# EAGLE board cpu-68010 (EAGLE 9.2.1)
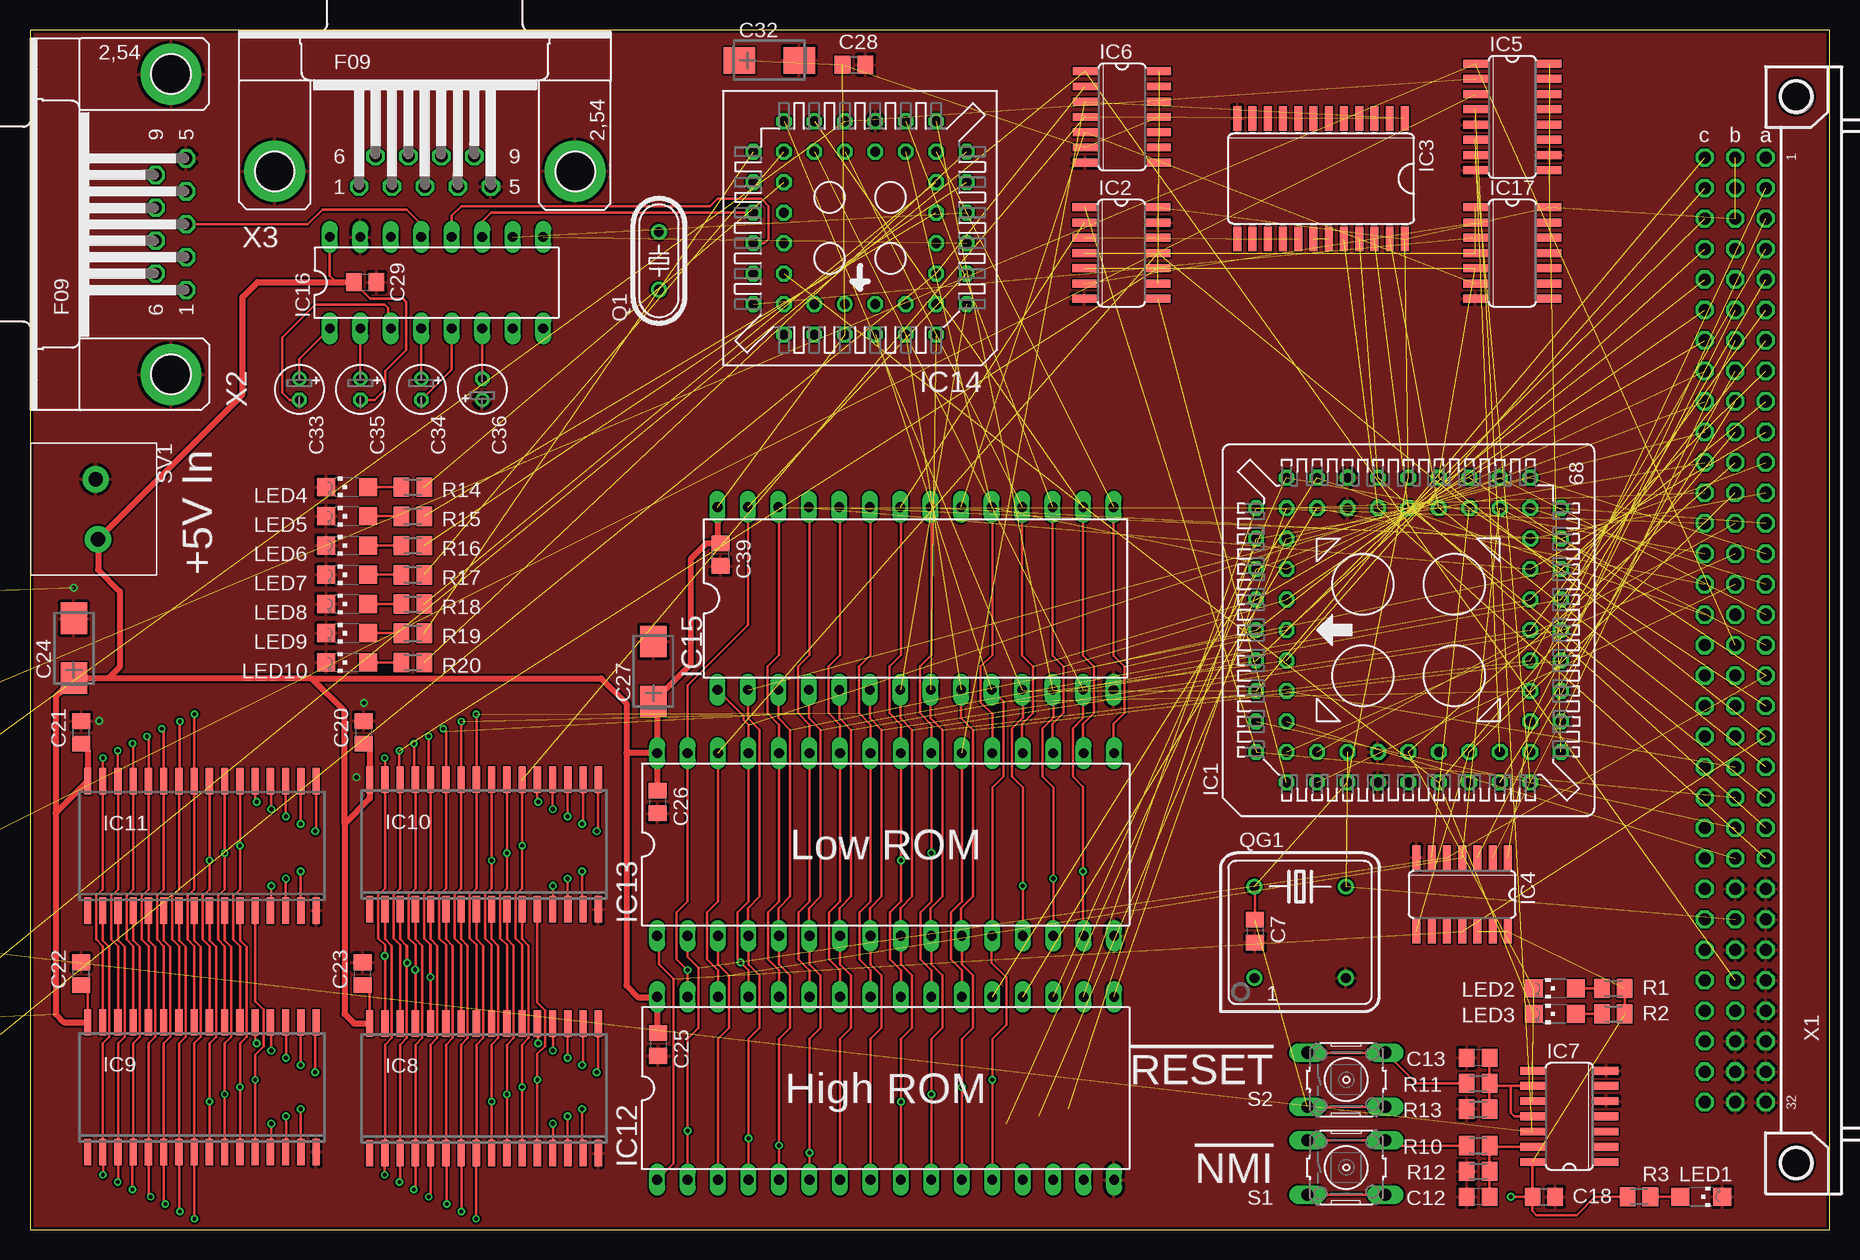
[diagram p0: board, top side]
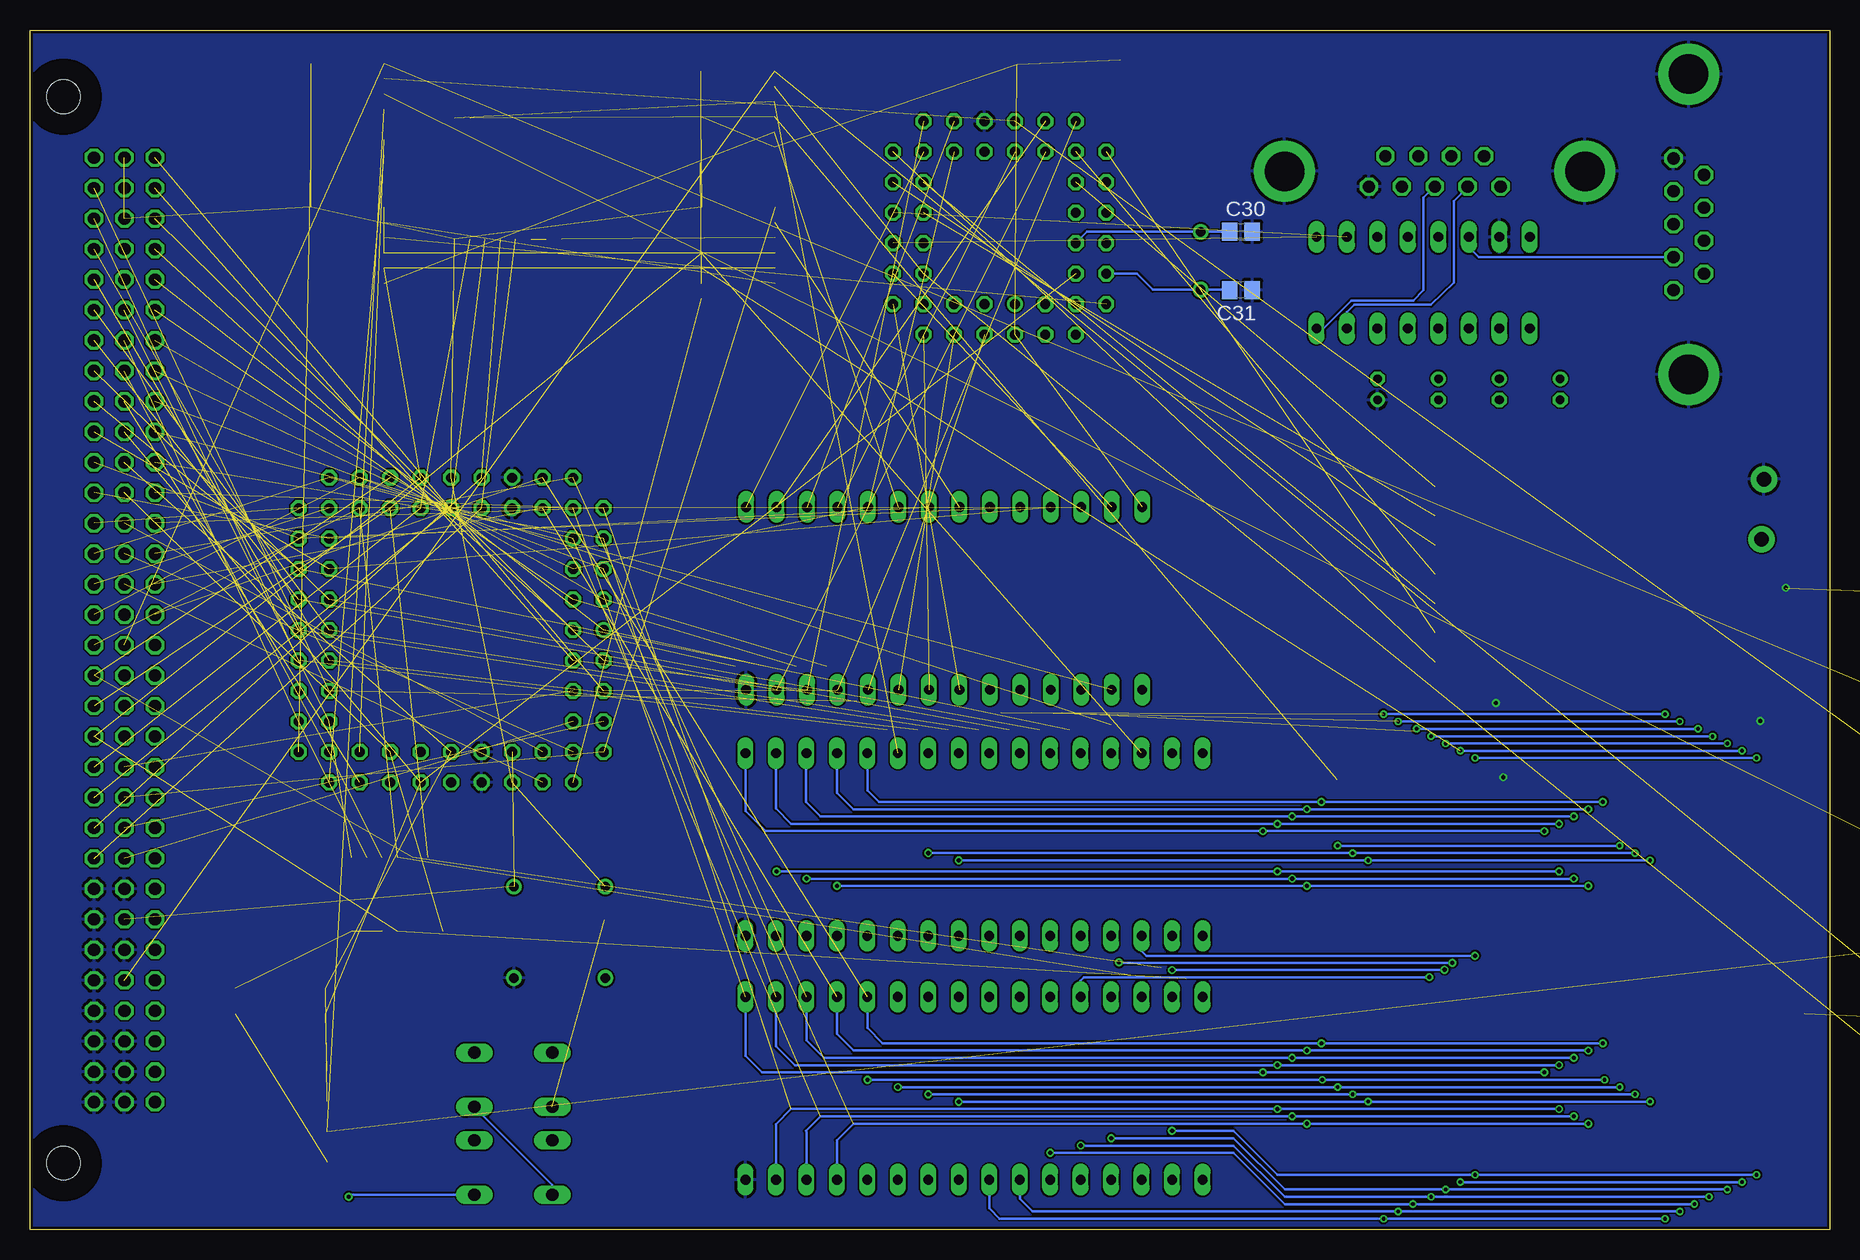
[diagram p1: board, bottom side, seen from below]

Size 150.01 x 100.03 mm. Coordinates in mm from the lower left corner, seen from the top.
Outline: 0,0.01 150,0.01 150,100.01 0,100.01 0,0.01
Copper layers (1*16): Top 0.035mm / dielectric 1.5mm / Bottom 0.035mm
Design rules "dirt_cheap_dirty_boards.v1.1": minimum track width 6mil, minimum drill 12mil, track to track 6mil, track to pad 6mil, pad to pad 6mil, via to via 6mil, smd to smd 0mil, copper to edge 10mil, drill to drill 10mil, minimum pad ring 10mil, minimum via ring 6mil, stop-mask expansion 2mil, vias tented up to drill 25mil, thermal gap 10mil

## Footprints (pad centres in the part's own frame; a part is rotated, then mirrored left to right if it is on the bottom)
C0805 = smd 1.3 x 1.5: 1 -0.95,0; 2 0.95,0
CT6032 = smd 2.6 x 2.2: + -2.5,0; - 2.5,0
E1,8-4 = drill 0.711 pad 1.168: + -0.889,0 | drill 0.711 pad 1.168 octagon: - 0.889,0
PLCC68SOCK = drill 0.813: 1 0,12.7 | drill 0.813 octagon: 2 0,10.16; 3 -2.54,12.7; 4 -2.54,10.16; 5 -5.08,12.7; 6 -5.08,10.16; 7 -7.62,12.7; 8 -7.62,10.16; 9 -10.16,12.7; 10 -12.7,10.16; 11 -10.16,10.16; 12 -12.7,7.62; 13 -10.16,7.62; 14 -12.7,5.08; 15 -10.16,5.08; 16 -12.7,2.54; 17 -10.16,2.54; 18 -12.7,0; 19 -10.16,0; 20 -12.7,-2.54; 21 -10.16,-2.54; 22 -12.7,-5.08; 23 -10.16,-5.08; 24 -12.7,-7.62; 25 -10.16,-7.62; 26 -12.7,-10.16; 27 -10.16,-12.7; 28 -10.16,-10.16; 29 -7.62,-12.7; 30 -7.62,-10.16; 31 -5.08,-12.7; 32 -5.08,-10.16; 33 -2.54,-12.7; 34 -2.54,-10.16; 35 0,-12.7; 36 0,-10.16; 37 2.54,-12.7; 38 2.54,-10.16; 39 5.08,-12.7; 40 5.08,-10.16; 41 7.62,-12.7; 42 7.62,-10.16; 43 10.16,-12.7; 44 12.7,-10.16; 45 10.16,-10.16; 46 12.7,-7.62; 47 10.16,-7.62; 48 12.7,-5.08; 49 10.16,-5.08; 50 12.7,-2.54; 51 10.16,-2.54; 52 12.7,0; 53 10.16,0; 54 12.7,2.54; 55 10.16,2.54; 56 12.7,5.08; 57 10.16,5.08; 58 12.7,7.62; 59 10.16,7.62; 60 12.7,10.16; 61 10.16,12.7; 62 10.16,10.16; 63 7.62,12.7; 64 7.62,10.16; 65 5.08,12.7; 66 5.08,10.16; 67 2.54,12.7; 68 2.54,10.16
SO14 = smd 0.66 x 2.032: 1 -3.81,-3.073; 2 -2.54,-3.073; 3 -1.27,-3.073; 4 0,-3.073; 5 1.27,-3.073; 6 2.54,-3.073; 7 3.81,-3.073; 8 3.81,3.073; 9 2.54,3.073; 10 1.27,3.073; 11 0,3.073; 12 -1.27,3.073; 13 -2.54,3.073; 14 -3.81,3.073
SO24W = smd 0.66 x 2.032: 1 -6.985,-5.029; 2 -5.715,-5.029; 3 -4.445,-5.029; 4 -3.175,-5.029; 5 -1.905,-5.029; 6 -0.635,-5.029; 7 0.635,-5.029; 8 1.905,-5.029; 9 3.175,-5.029; 10 4.445,-5.029; 11 5.715,-5.029; 12 6.985,-5.029; 13 6.985,5.029; 14 5.715,5.029; 15 4.445,5.029; 16 3.175,5.029; 17 1.905,5.029; 18 0.635,5.029; 19 -0.635,5.029; 20 -1.905,5.029; 21 -3.175,5.029; 22 -4.445,5.029; 23 -5.715,5.029; 24 -6.985,5.029
SO16 = smd 0.66 x 2.032: 1 -4.445,-3.073; 2 -3.175,-3.073; 3 -1.905,-3.073; 4 -0.635,-3.073; 5 0.635,-3.073; 6 1.905,-3.073; 7 3.175,-3.073; 8 4.445,-3.073; 9 4.445,3.073; 10 3.175,3.073; 11 1.905,3.073; 12 0.635,3.073; 13 -0.635,3.073; 14 -1.905,3.073; 15 -3.175,3.073; 16 -4.445,3.073
SO32X = smd 0.6 x 2.2: 1 -9.525,-5.4; 2 -8.255,-5.4; 3 -6.985,-5.4; 4 -5.715,-5.4; 5 -4.445,-5.4; 6 -3.175,-5.4; 7 -1.905,-5.4; 8 -0.635,-5.4; 9 0.635,-5.4; 10 1.905,-5.4; 11 3.175,-5.4; 12 4.445,-5.4; 13 5.715,-5.4; 14 6.985,-5.4; 15 8.255,-5.4; 16 9.525,-5.4; 17 9.525,5.4; 18 8.255,5.4; 19 6.985,5.4; 20 5.715,5.4; 21 4.445,5.4; 22 3.175,5.4; 23 1.905,5.4; 24 0.635,5.4; 25 -0.635,5.4; 26 -1.905,5.4; 27 -3.175,5.4; 28 -4.445,5.4; 29 -5.715,5.4; 30 -6.985,5.4; 31 -8.255,5.4; 32 -9.525,5.4
DIL32 = drill 0.813 long: 1 -19.05,-7.62; 2 -16.51,-7.62; 3 -13.97,-7.62; 4 -11.43,-7.62; 5 -8.89,-7.62; 6 -6.35,-7.62; 7 -3.81,-7.62; 8 -1.27,-7.62; 9 1.27,-7.62; 10 3.81,-7.62; 11 6.35,-7.62; 12 8.89,-7.62; 13 11.43,-7.62; 14 13.97,-7.62; 15 16.51,-7.62; 16 19.05,-7.62; 17 19.05,7.62; 18 16.51,7.62; 19 13.97,7.62; 20 11.43,7.62; 21 8.89,7.62; 22 6.35,7.62; 23 3.81,7.62; 24 1.27,7.62; 25 -1.27,7.62; 26 -3.81,7.62; 27 -6.35,7.62; 28 -8.89,7.62; 29 -11.43,7.62; 30 -13.97,7.62; 31 -16.51,7.62; 32 -19.05,7.62
PLCC-S44 = drill 0.813: 1 1.27,6.35 | drill 0.813 octagon: 2 -1.27,8.89; 3 -1.27,6.35; 4 -3.81,8.89; 5 -3.81,6.35; 6 -6.35,8.89; 7 -8.89,6.35; 8 -6.35,6.35; 9 -8.89,3.81; 10 -6.35,3.81; 11 -8.89,1.27; 12 -6.35,1.27; 13 -8.89,-1.27; 14 -6.35,-1.27; 15 -8.89,-3.81; 16 -6.35,-3.81; 17 -8.89,-6.35; 18 -6.35,-8.89; 19 -6.35,-6.35; 20 -3.81,-8.89; 21 -3.81,-6.35; 22 -1.27,-8.89; 23 -1.27,-6.35; 24 1.27,-8.89; 25 1.27,-6.35; 26 3.81,-8.89; 27 3.81,-6.35; 28 6.35,-8.89; 29 8.89,-6.35; 30 6.35,-6.35; 31 8.89,-3.81; 32 6.35,-3.81; 33 8.89,-1.27; 34 6.35,-1.27; 35 8.89,1.27; 36 6.35,1.27; 37 8.89,3.81; 38 6.35,3.81; 39 8.89,6.35; 40 6.35,8.89; 41 6.35,6.35; 42 3.81,8.89; 43 3.81,6.35; 44 1.27,8.89
DIL28-6 = drill 0.813 long: 1 -16.51,-7.62; 2 -13.97,-7.62; 3 -11.43,-7.62; 4 -8.89,-7.62; 5 -6.35,-7.62; 6 -3.81,-7.62; 7 -1.27,-7.62; 8 1.27,-7.62; 9 3.81,-7.62; 10 6.35,-7.62; 11 8.89,-7.62; 12 11.43,-7.62; 13 13.97,-7.62; 14 16.51,-7.62; 15 16.51,7.62; 16 13.97,7.62; 17 11.43,7.62; 18 8.89,7.62; 19 6.35,7.62; 20 3.81,7.62; 21 1.27,7.62; 22 -1.27,7.62; 23 -3.81,7.62; 24 -6.35,7.62; 25 -8.89,7.62; 26 -11.43,7.62; 27 -13.97,7.62; 28 -16.51,7.62
DIL16 = drill 0.813 long: 1 -8.89,-3.81; 2 -6.35,-3.81; 3 -3.81,-3.81; 4 -1.27,-3.81; 5 1.27,-3.81; 6 3.81,-3.81; 7 6.35,-3.81; 8 8.89,-3.81; 9 8.89,3.81; 10 6.35,3.81; 11 3.81,3.81; 12 1.27,3.81; 13 -1.27,3.81; 14 -3.81,3.81; 15 -6.35,3.81; 16 -8.89,3.81
CHIPLED_1206 = smd 1.5 x 1.5: A 0,-1.75; C 0,1.75
HC49/S = drill 0.813: 1 -2.413,0; 2 2.413,0
DIL08S = drill 0.813: 1 -3.81,-3.81; 4 3.81,-3.81; 5 3.81,3.81; 8 -3.81,3.81
M0805 = smd 1.3 x 1.6: 1 -0.95,0; 2 0.95,0
B3F-10XX = drill 1.016 long: 1 -3.251,2.261; 2 3.251,2.261; 3 -3.251,-2.261; 4 3.251,-2.261
1792863 = drill 1.2 pad 2.2: 1 0,-0.1; 2 5,0.1
FABC96R = drill 1.016 octagon: A1 -2.54,39.37; A2 -2.54,36.83; A3 -2.54,34.29; A4 -2.54,31.75; A5 -2.54,29.21; A6 -2.54,26.67; A7 -2.54,24.13; A8 -2.54,21.59; A9 -2.54,19.05; A10 -2.54,16.51; A11 -2.54,13.97; A12 -2.54,11.43; A13 -2.54,8.89; A14 -2.54,6.35; A15 -2.54,3.81; A16 -2.54,1.27; A17 -2.54,-1.27; A18 -2.54,-3.81; A19 -2.54,-6.35; A20 -2.54,-8.89; A21 -2.54,-11.43; A22 -2.54,-13.97; A23 -2.54,-16.51; A24 -2.54,-19.05; A25 -2.54,-21.59; A26 -2.54,-24.13; A27 -2.54,-26.67; A28 -2.54,-29.21; A29 -2.54,-31.75; A30 -2.54,-34.29; A31 -2.54,-36.83; A32 -2.54,-39.37; B1 -5.08,39.37; B2 -5.08,36.83; B3 -5.08,34.29; B4 -5.08,31.75; B5 -5.08,29.21; B6 -5.08,26.67; B7 -5.08,24.13; B8 -5.08,21.59; B9 -5.08,19.05; B10 -5.08,16.51; B11 -5.08,13.97; B12 -5.08,11.43; B13 -5.08,8.89; B14 -5.08,6.35; B15 -5.08,3.81; B16 -5.08,1.27; B17 -5.08,-1.27; B18 -5.08,-3.81; B19 -5.08,-6.35; B20 -5.08,-8.89; B21 -5.08,-11.43; B22 -5.08,-13.97; B23 -5.08,-16.51; B24 -5.08,-19.05; B25 -5.08,-21.59; B26 -5.08,-24.13; B27 -5.08,-26.67; B28 -5.08,-29.21; B29 -5.08,-31.75; B30 -5.08,-34.29; B31 -5.08,-36.83; B32 -5.08,-39.37; C1 -7.62,39.37; C2 -7.62,36.83; C3 -7.62,34.29; C4 -7.62,31.75; C5 -7.62,29.21; C6 -7.62,26.67; C7 -7.62,24.13; C8 -7.62,21.59; C9 -7.62,19.05; C10 -7.62,16.51; C11 -7.62,13.97; C12 -7.62,11.43; C13 -7.62,8.89; C14 -7.62,6.35; C15 -7.62,3.81; C16 -7.62,1.27; C17 -7.62,-1.27; C18 -7.62,-3.81; C19 -7.62,-6.35; C20 -7.62,-8.89; C21 -7.62,-11.43; C22 -7.62,-13.97; C23 -7.62,-16.51; C24 -7.62,-19.05; C25 -7.62,-21.59; C26 -7.62,-24.13; C27 -7.62,-26.67; C28 -7.62,-29.21; C29 -7.62,-31.75; C30 -7.62,-34.29; C31 -7.62,-36.83; C32 -7.62,-39.37 | hole 2.794: 0,-44.456; 0,44.456
F09HP = drill 1.016 octagon: 1 -5.486,-1.27; 2 -2.743,-1.27; 3 0,-1.27; 4 2.743,-1.27; 5 5.486,-1.27; 6 -4.115,1.27; 7 -1.372,1.27; 8 1.372,1.27; 9 4.115,1.27 | drill 3.302 pad 5.08: G1 -12.522,0; G2 12.522,0

## Placement (x,y rotation side)
C1  100nF  [C0805]  -5.63,68.79 0 top  (outside the outline)
C2  100nF  [C0805]  -13.63,84.33 0 top  (outside the outline)
C3  100nF  [C0805]  -19.62,50.33 0 top  (outside the outline)
C4  47µF  [CT6032]  -6.82,61.82 0 top  (outside the outline)
C5  100nF  [C0805]  -11.31,90.95 0 top  (outside the outline)
C6  100nF  [C0805]  -15.76,70.41 0 top  (outside the outline)
C7  100nF  [C0805]  102.11,24.9 270 top
C8  47µF  [CT6032]  -9.32,97.01 0 top  (outside the outline)
C9  100nF  [C0805]  -10.16,77.48 0 top  (outside the outline)
C10  100nF  [C0805]  -19.42,43.12 0 top  (outside the outline)
C11  47µF  [CT6032]  -17.77,61 0 top  (outside the outline)
C12  100nF  [C0805]  120.7,2.76 180 top
C13  100nF  [C0805]  120.7,14.34 180 top
C14  100nF  [C0805]  -18.39,37.39 0 top  (outside the outline)
C15  100nF  [C0805]  -15.56,46.95 0 top  (outside the outline)
C16  100nF  [C0805]  -17.05,14.04 0 top  (outside the outline)
C17  100nF  [C0805]  -18.02,21 0 top  (outside the outline)
C18  100nF  [C0805]  126.19,2.76 0 top
C19  47µF  [CT6032]  -18.64,29.63 0 top  (outside the outline)
C20  100nF  [C0805]  27.83,41.47 90 top
C21  100nF  [C0805]  4.27,41.47 90 top
C22  100nF  [C0805]  4.27,21.35 90 top
C23  100nF  [C0805]  27.74,21.35 90 top
C24  47µF  [CT6032]  3.66,48.48 90 top
C25  100nF  [C0805]  52.37,15.46 270 top
C26  100nF  [C0805]  52.32,35.67 270 top
C27  47µF  [CT6032]  51.97,46.55 90 top
C28  100nF  [C0805]  68.68,97.14 0 top
C29  100nF  [C0805]  27.94,79.01 0 top
C30  30pF  [C0805]  49.07,83.22 0 bottom
C31  30pF  [C0805]  49.07,78.35 180 bottom
C32  47µF  [CT6032]  61.62,97.5 0 top
C33  10µF  [E1,8-4]  22.45,70.07 270 top
C34  10µF  [E1,8-4]  32.61,70.07 270 top
C35  10µF  [E1,8-4]  27.53,70.07 270 top
C36  10µF  [E1,8-4]  37.69,70.07 90 top
C37  100nF  [C0805]  -12.7,66.05 0 top  (outside the outline)
C38  100nF  [C0805]  -19.05,54.62 0 top  (outside the outline)
C39  100nF  [C0805]  57.56,56.3 270 top
C40  47µF  [CT6032]  -6.84,53.19 0 top  (outside the outline)
IC1  [PLCC68SOCK]  114.91,50 90 top
IC2  74HC04D  [SO14]  90.97,81.43 270 top
IC3  74HCT154DW  [SO24W]  107.62,87.63 180 top
IC4  74HC30D  [SO14]  119.38,27.95 180 top
IC5  74HC148D  [SO16]  123.56,92.78 270 top
IC6  74HC30D  [SO14]  91.03,92.78 270 top
IC7  74HC14D  [SO14]  128.32,9.46 90 top
IC8  [SO32X]  37.85,11.8 0 top
IC9  [SO32X]  14.33,11.9 0 top
IC10  [SO32X]  37.85,32.12 0 top
IC11  [SO32X]  14.33,32.02 0 top
IC12  [DIL32]  71.32,11.8 0 top
IC13  [DIL32]  71.32,32.12 0 top
IC14  [PLCC-S44]  69.19,83.53 180 top
IC15  [DIL28-6]  73.81,52.64 0 top
IC16  MAX232  [DIL16]  33.88,78.96 0 top
IC17  74HC00D  [SO14]  123.56,81.43 270 top
LED1  GRN  [CHIPLED_1206]  139.29,2.76 270 top
LED2  RED  [CHIPLED_1206]  127.1,20.13 90 top
LED3  RED  [CHIPLED_1206]  127.1,18 90 top
LED4  YEL  [CHIPLED_1206]  26.43,61.93 90 top
LED5  YEL  [CHIPLED_1206]  26.43,59.49 90 top
LED6  YEL  [CHIPLED_1206]  26.43,57.05 90 top
LED7  YEL  [CHIPLED_1206]  26.43,54.61 90 top
LED8  YEL  [CHIPLED_1206]  26.43,52.17 90 top
LED9  YEL  [CHIPLED_1206]  26.43,49.74 90 top
LED10  YEL  [CHIPLED_1206]  26.43,47.3 90 top
Q1  3.6864MHz  [HC49/S]  52.43,80.78 90 top
QG1  [DIL08S]  105.87,24.8 0 top
R1  2k  [M0805]  131.98,20.13 180 top
R2  2k  [M0805]  131.98,18 180 top
R3  2k  [M0805]  134.11,2.76 0 top
R4  10k  [M0805]  -10.01,42.98 0 top  (outside the outline)
R5  10k  [M0805]  -10.01,36.58 0 top  (outside the outline)
R6  10k  [M0805]  -10.01,30.18 0 top  (outside the outline)
R7  10k  [M0805]  -10.01,23.78 0 top  (outside the outline)
R8  10k  [M0805]  -10.01,17.38 0 top  (outside the outline)
R9  10k  [M0805]  -10.01,10.98 0 top  (outside the outline)
R10  10k  [M0805]  120.7,7.02 180 top
R11  10k  [M0805]  120.7,12.2 180 top
R12  10k  [M0805]  120.7,4.89 180 top
R13  10k  [M0805]  120.7,10.07 180 top
R14  2k  [M0805]  31.91,61.93 180 top
R15  2k  [M0805]  31.91,59.49 180 top
R16  2k  [M0805]  31.91,57.05 180 top
R17  2k  [M0805]  31.91,54.61 180 top
R18  2k  [M0805]  31.91,52.17 180 top
R19  2k  [M0805]  31.91,49.74 180 top
R20  2k  [M0805]  31.91,47.3 180 top
S1  [B3F-10XX]  109.73,5.19 0 top
S2  [B3F-10XX]  109.73,12.51 0 top
SV1  1792863  [1792863]  5.58,62.58 270 top
X1  FABC96R  [FABC96R]  147.22,50.01 0 top
X2  [F09HP]  11.75,83.83 90 top
X3  [F09HP]  32.92,88.24 0 top

## Library data of the parts
C1-C3 C5-C7 C9 C10 C12-C18 C20-C23 C25 C26 C28-C31 C37-C39 = rcl; MOUSER: 710-885012207072; SPICEPREFIX: C
C4 C8 C11 C19 C24 C27 C32 C40 = rcl; MOUSER: 581-TAJD476M016RNJV; SPICEPREFIX: C
C33-C36 = rcl; SPICEPREFIX: C
IC1 = 68komputer; OC_FARNELL: unknown; OC_NEWARK: unknown
IC2-IC7 IC17 = 74xx-eu
IC8-IC11 IC14 = 68komputer
IC12 IC13 = 68komputer; MOUSER: 804-39SF020A7CPHE
IC15 = 68komputer; MOUSER: 700-DS1244Y-70
IC16 = maxim; MF: MAXIM; MPN: MAX232ACPE+; OC_FARNELL: 9723773; OC_NEWARK: 68K4544
LED1 = led; MOUSER: 604-APTR3216SGC
LED2 LED3 = led; MOUSER: 710-156120RS75300
LED4-LED10 = led; MOUSER: 710-156120YS75300
Q1 = crystal; OC_FARNELL: 1667008; OC_NEWARK: unknown
QG1 = crystal; OC_FARNELL: unknown; OC_NEWARK: unknown
R1-R20 = rcl; MOUSER: 652-CR0805-FX6800GLF; SPICEPREFIX: R
S1 S2 = switch-omron; MPN: B3F-1000; OC_FARNELL: 176432; OC_NEWARK: 36M3542
SV1 = 68komputer; MOUSER: 651-1792863
X1 = con-vg
X2 X3 = con-subd; OC_FARNELL: unknown; OC_NEWARK: unknown

## Nets
68681_XTAL1: C30.1 IC14.36 Q1.2
68681_XTAL2: C31.2 IC14.37 Q1.1
!68681_CS: IC14.39 IC17.3
!68681_DTACK: IC6.2 IC14.10 R9.2
!68681_IRQ: IC5.2 IC14.24 R5.2
!68681_IRQACK: IC14.41
!A18: IC2.10 IC8.30 IC9.30 IC10.30 IC11.30
!A19: IC2.6 IC17.2
!AS: IC1.6 X1.B21
!BERR: IC1.24 X1.B9
!BG: IC1.11 X1.B14
!BGACK: IC1.12 X1.B15
!BR: IC1.13 X1.B13
!DTACK: IC1.10 IC2.8
!EXT_DTACK: IC6.1 R8.2 X1.B28
!EXT_IRQ: IC5.1 R4.2 X1.B17
!HALT: IC1.19 IC7.10 LED2.C X1.B11
!IPL0: IC1.27 IC5.9
!IPL1: IC1.26 IC5.7
!IPL2: IC1.25 IC5.6
!LDS: IC1.8 X1.B24
!NMI: IC5.4 IC7.12 R7.2
!OE: IC2.2 IC8.24 IC9.24 IC10.24 IC11.24 IC12.24 IC13.24 IC15.22
!REGION0: IC3.1 IC6.3 IC12.22 IC13.22
!REGION1: IC3.2 IC6.4 IC8.22 IC9.22 IC10.22 IC11.22
!REGION2: IC3.3
!REGION3: IC3.4
!REGION4: IC3.5
!REGION5: IC3.6
!REGION6: IC3.7
!REGION7: IC3.8
!REGION8: IC3.9
!REGION9: IC3.10
!REGION10: IC3.11
!REGION11: IC3.13
!REGION12: IC3.14
!REGION13: IC3.15
!REGION14: IC3.16
!REGION15: IC2.3 IC3.17
!RESET: IC1.20 IC7.8 IC14.38 LED3.C X1.B10
!RTC_CS: IC6.5 IC15.20 IC17.6
!TIMER_IRQ: IC5.3 R6.2
!UDS: IC1.7 X1.B23
!VMA: IC1.21
!VPA: IC1.23 IC4.8 X1.B12
+5V: C1.1 C2.1 C3.1 C4.+ C5.1 C6.1 C7.1 C8.+ C9.1 C10.1 C11.+ C14.1 C15.1 C16.1 C17.1 C18.1 C19.+ C20.1 C21.1 C22.1 C23.1 C24.+ C25.1 C26.1 C27.+ C28.1 C29.1 C32.+ C35.- C37.1 C38.1 C39.1 C40.+ IC1.14 IC1.52 IC2.14 IC3.24 IC4.12 IC4.14 IC5.11 IC5.12 IC5.13 IC5.16 IC6.6 IC6.11 IC6.12 IC6.14 IC7.14 IC8.32 IC9.32 IC10.32 IC11.32 IC12.32 IC13.32 IC14.44 IC15.28 IC16.16 IC17.14 QG1.8 R1.1 R2.1 R3.1 R4.1 R8.1 R9.1 S1.3 S1.4 S2.3 S2.4 SV1.2 X1.B1 X1.B2 X1.B3
/AS: IC3.18 IC3.19
A1: IC1.32 IC8.12 IC9.12 IC10.12 IC11.12 IC12.12 IC13.12 IC14.2 IC15.10 X1.A2
A2: IC1.33 IC8.11 IC9.11 IC10.11 IC11.11 IC12.11 IC13.11 IC14.4 IC15.9 X1.A3
A3: IC1.34 IC8.10 IC9.10 IC10.10 IC11.10 IC12.10 IC13.10 IC14.6 IC15.8 X1.A4
A4: IC1.35 IC8.9 IC9.9 IC10.9 IC11.9 IC12.9 IC13.9 IC14.7 IC15.7 X1.A5
A5: IC1.36 IC8.8 IC9.8 IC10.8 IC11.8 IC12.8 IC13.8 IC15.6 X1.A6
A6: IC1.37 IC8.7 IC9.7 IC10.7 IC11.7 IC12.7 IC13.7 IC15.5 X1.A7
A7: IC1.38 IC8.6 IC9.6 IC10.6 IC11.6 IC12.6 IC13.6 IC15.4 X1.A8
A8: IC1.39 IC8.5 IC9.5 IC10.5 IC11.5 IC12.5 IC13.5 IC15.3 X1.A9
A9: IC1.40 IC8.27 IC9.27 IC10.27 IC11.27 IC12.27 IC13.27 IC15.25 X1.A10
A10: IC1.41 IC8.26 IC9.26 IC10.26 IC11.26 IC12.26 IC13.26 IC15.24 X1.A11
A11: IC1.42 IC8.23 IC9.23 IC10.23 IC11.23 IC12.23 IC13.23 IC15.21 X1.A12
A12: IC1.43 IC8.25 IC9.25 IC10.25 IC11.25 IC12.25 IC13.25 IC15.23 X1.A13
A13: IC1.44 IC8.4 IC9.4 IC10.4 IC11.4 IC12.4 IC13.4 IC15.2 X1.A14
A14: IC1.45 IC8.28 IC9.28 IC10.28 IC11.28 IC12.28 IC13.28 IC15.26 X1.A15
A15: IC1.46 IC8.3 IC9.3 IC10.3 IC11.3 IC12.29 IC13.29 IC15.1 X1.A16
A16: IC1.47 IC4.4 IC8.31 IC9.31 IC10.31 IC11.31 IC12.3 IC13.3 X1.A17
A17: IC1.48 IC4.5 IC8.2 IC9.2 IC10.2 IC11.2 IC12.2 IC13.2 X1.A18
A18: IC1.49 IC2.11 IC4.6 IC12.30 IC13.30 X1.A19
A19: IC1.50 IC2.5 IC4.11 IC12.1 IC13.1 IC17.5 X1.A20
A20: IC1.51 IC3.23 X1.A21
A21: IC1.53 IC3.22 X1.A22
A22: IC1.54 IC3.21 X1.A23
A23: IC1.55 IC3.20 X1.A24
CLK: IC1.15 QG1.5 X1.B26
D0: IC1.5 IC10.13 IC11.13 IC13.13 IC14.28 IC15.11 X1.C1
D1: IC1.4 IC10.14 IC11.14 IC13.14 IC14.18 IC15.12 X1.C2
D2: IC1.3 IC10.15 IC11.15 IC13.15 IC14.27 IC15.13 X1.C3
D3: IC1.2 IC10.17 IC11.17 IC13.17 IC14.19 IC15.15 X1.C4
D4: IC1.1 IC10.18 IC11.18 IC13.18 IC14.26 IC15.16 X1.C5
D5: IC1.68 IC10.19 IC11.19 IC13.19 IC14.20 IC15.17 X1.C6
D6: IC1.67 IC10.20 IC11.20 IC13.20 IC14.25 IC15.18 X1.C7
D7: IC1.66 IC10.21 IC11.21 IC13.21 IC14.21 IC15.19 X1.C8
D8: IC1.65 IC8.13 IC9.13 IC12.13 X1.C9
D9: IC1.64 IC8.14 IC9.14 IC12.14 X1.C10
D10: IC1.63 IC8.15 IC9.15 IC12.15 X1.C11
D11: IC1.62 IC8.17 IC9.17 IC12.17 X1.C12
D12: IC1.61 IC8.18 IC9.18 IC12.18 X1.C13
D13: IC1.60 IC8.19 IC9.19 IC12.19 X1.C14
D14: IC1.59 IC8.20 IC9.20 IC12.20 X1.C15
D15: IC1.58 IC8.21 IC9.21 IC12.21 X1.C16
DTACK: IC2.9 IC6.8
E: IC1.22
FC0: IC1.30 IC4.1 X1.B6
FC1: IC1.29 IC4.2 X1.B7
FC2: IC1.28 IC4.3 X1.B8
GND: C1.2 C2.2 C3.2 C4.- C5.2 C6.2 C7.2 C8.- C9.2 C10.2 C11.- C12.2 C13.2 C14.2 C15.2 C16.2 C17.2 C18.2 C19.- C20.2 C21.2 C22.2 C23.2 C24.- C25.2 C26.2 C27.- C28.2 C29.2 C30.2 C31.1 C32.- C36.+ C37.2 C38.2 C39.2 C40.- IC1.16 IC1.17 IC1.56 IC1.57 IC2.7 IC2.13 IC3.12 IC4.7 IC5.5 IC5.8 IC5.10 IC6.7 IC7.5 IC7.7 IC8.16 IC9.16 IC10.16 IC11.16 IC12.16 IC13.16 IC14.22 IC15.14 IC16.15 IC17.7 LED1.C LED4.C LED5.C LED6.C LED7.C LED8.C LED9.C LED10.C QG1.4 R12.2 R13.2 SV1.1 X1.A25 X1.A26 X1.A27 X1.A28 X1.A29 X1.A30 X1.A31 X1.A32 X1.B25 X1.B27 X1.B30 X1.B31 X1.B32 X2.5 X2.G1 X2.G2 X3.5 X3.G1 X3.G2
GPIO_IN0: IC14.8
GPIO_IN1: IC14.5
GPIO_IN2: IC14.40
GPIO_IN3: IC14.3
GPIO_IN4: IC14.43
GPIO_IN5: IC14.42
GPIO_OUT0: IC14.32 R14.1
GPIO_OUT1: IC14.14 R15.1
GPIO_OUT2: IC14.15 R16.1
GPIO_OUT3: IC14.30 R17.1
GPIO_OUT4: IC14.16 R18.1
GPIO_OUT5: IC14.29 R19.1
GPIO_OUT6: IC14.17 R20.1
N$1: C35.+ IC16.2
N$2: C36.- IC16.6
N$3: C33.+ IC16.1
N$4: C34.+ IC16.4
N$5: C33.- IC16.3
N$6: C34.- IC16.5
N$7: LED9.A R19.2
N$8: LED8.A R18.2
N$9: R11.2 S2.1 S2.2
N$10: LED7.A R17.2
N$11: LED6.A R16.2
N$12: LED3.A R2.2
N$13: LED5.A R15.2
N$14: LED4.A R14.2
N$15: LED2.A R1.2
N$17: LED10.A R20.2
N$18: R10.2 S1.1 S1.2
N$19: LED1.A R3.2
NMI_SW: C12.1 IC7.13 R10.1 R12.1
R!W!: IC1.9 IC2.1 X1.B22
R/!W!: IC8.29 IC9.29 IC10.29 IC11.29 IC12.31 IC13.31 IC14.9 IC15.27
REGION15: IC2.4 IC17.1 IC17.4
RESET_SW: C13.1 IC7.9 IC7.11 R11.1 R13.1
RS232_0_RX: IC16.14 X2.2
RS232_0_TX: IC16.13 X2.3
RS232_1_RX: IC16.7 X3.2
RS232_1_TX: IC16.8 X3.3
TIMER_CLK: IC14.31
UART0_RX: IC14.35 IC16.12
UART0_TX: IC14.33 IC16.11
UART1_RX: IC14.11 IC16.9
UART1_TX: IC14.13 IC16.10

## Tracks (layer width: path | path; a pad name or v marks a point on that pad's centre or on a via)
68681_XTAL1
  Bottom 0.203: C30.1 52.4,83.22 Q1.2 61.9,83.2 IC14.36
68681_XTAL2
  Bottom 0.203: C31.2 50.05,78.37 Q1.1 56.41,78.37 57.76,79.72 IC14.37
!68681_CS  (1 unrouted)
!68681_DTACK  (2 unrouted)
!68681_IRQ  (2 unrouted)
!A18  (via drill 0.3)  (1 unrouted)
  Top 0.203: IC8.30 30.86,23.74 30.31,24.29 30.31,27.92 30.86,28.48 IC10.30 30.79,37.59 v30.79,39.94 | IC9.30 7.34,23.64 6.79,24.19 6.79,27.82 7.34,28.38 IC11.30 7.32,37.44 v7.32,39.94
  Bottom 0.203: v7.32,39.94 v30.79,39.94
!A19  (1 unrouted)
!AS  (1 unrouted)
!BERR  (1 unrouted)
!BG  (1 unrouted)
!BGACK  (1 unrouted)
!BR  (1 unrouted)
!DTACK  (1 unrouted)
!EXT_DTACK  (2 unrouted)
!EXT_IRQ  (2 unrouted)
!HALT  (3 unrouted)
!IPL0  (1 unrouted)
!IPL1  (1 unrouted)
!IPL2  (1 unrouted)
!LDS  (1 unrouted)
!NMI  (2 unrouted)
!OE  (via drill 0.3, 0.35)  (1 unrouted)
  Top 0.203: IC8.24 38.48,23.74 37.93,24.29 37.93,27.92 38.48,28.48 v38.48,30.8 IC10.24 | IC9.24 14.96,23.64 14.41,24.19 14.41,27.82 14.96,28.38 v14.96,30.8 IC11.24 | IC12.24 72.59,21.63 71.68,22.54 71.68,26.45 72.59,27.37 v72.59,30.8 IC13.24 72.59,42.1 71.63,43.07 71.63,46.97 72.59,47.94 72.59,60.21 IC15.22
  Bottom 0.203: v14.96,30.8 v38.48,30.8 v72.59,30.8
!REGION0  (2 unrouted)
  Top 0.203: IC12.22 77.67,21.63 76.76,22.54 76.76,26.45 77.67,27.37 IC13.22
!REGION1  (via drill 0.3)  (2 unrouted)
  Top 0.203: IC8.22 41.02,23.74 40.47,24.29 40.47,27.92 41.02,28.48 v41.02,32.02 IC10.22 | IC9.22 17.5,23.64 16.95,24.19 16.95,27.82 17.5,28.38 v17.5,32.02 IC11.22
  Bottom 0.203: v17.5,32.02 v41.02,32.02
!REGION15  (1 unrouted)
!RESET  (4 unrouted)
!RTC_CS  (2 unrouted)
!TIMER_IRQ  (1 unrouted)
!UDS  (1 unrouted)
!VPA  (2 unrouted)
+5V  (via drill 0.35)  (45 unrouted)
  Top 0.203: IC16.16 24.99,79.57 25.55,79.01 C29.1 28.36,77.64 31.1,77.64 31.34,77.35 31.34,73.36 29.62,71.6 29.62,70.06 28.73,69.18 C35.- | S1.4 S1.3 | S2.3 S2.4 | IC7.14 125.25,2.77 C18.1 | v123.44,2.76 C18.1 | R1.1 R2.1 | C23.1 28.32,19.81 IC8.32 | C22.1 4.8,19.87 IC9.32 | C21.1 4.8,39.98 | C20.1 28.32,40.02 | 52.27,36.67 C26.1 | 52.27,16.51 C25.1 | 57.3,57.5 C39.1 | QG1.8 102.11,28.56 C7.1 | C27.+ 52.27,43.74 | R3.1 130.45,2.76 128.93,1.23 125.58,1.23 125.24,1.57 C18.1
  Top 0.508: 4.8,39.98 IC11.32 2.13,34.75 | 28.32,40.02 IC10.32 28.32,35.95 26.21,33.85 | IC13.32 52.27,36.67 | 52.27,16.51 IC12.32 52.23,19.38 50.69,19.38 49.71,20.36 49.71,39.73 | 26.21,33.85 26.21,18 27.01,17.2 IC8.32 | IC9.32 2.83,17.3 2.13,18 2.13,34.75 | 2.13,34.75 2.13,44.45 C24.+ 6.53,45.96 | IC15.28 57.3,57.5 | 52.27,43.74 IC13.32 | 6.53,45.96 7.49,46.92 7.49,53.23 5.68,55.05 SV1.2 17.73,69.63 17.73,77.76 18.97,79.01 C29.1 | 26.21,33.85 26.21,43.24 23.49,45.96 | 23.49,45.96 6.53,45.96 | 23.49,45.96 47.62,45.96 49.71,43.88 49.71,39.73 | IC13.32 49.72,39.74 49.71,39.73 | C27.+ 55.1,47.18 55.1,55.96 56.39,57.25 C39.1
  Bottom 0.203: S2.4 106.48,3.75 S1.3 | S1.4 123.27,2.93 v123.44,2.76
/AS  (1 unrouted)
A1  (via drill 0.3, 0.35)  (3 unrouted)
  Top 0.203: IC10.12 42.29,18.96 42.95,18.3 42.95,15.32 42.29,14.66 v42.29,12.51 IC8.12 | IC9.12 v18.77,12.51 18.77,14.61 19.48,15.32 19.48,18.35 18.77,19.06 IC11.12 | IC15.10 81.13,44.06 81.13,37.78 80.21,36.87 IC13.12 80.16,24.45 80.16,22.26 81.38,21.04 81.38,17.08 80.21,15.91 v80.21,12.51 IC12.12
  Bottom 0.203: v18.77,12.51 v42.29,12.51 v80.21,12.51
A2  (via drill 0.3, 0.35)  (3 unrouted)
  Top 0.203: IC10.11 41.02,24.24 41.58,23.69 41.58,15.99 41.02,15.44 v41.02,11.9 IC8.11 | IC11.11 17.5,24.14 18.05,23.59 18.05,16.09 17.5,15.54 v17.5,11.9 IC9.11 | 77.67,24.4 77.67,22.13 78.59,21.22 78.59,16.85 77.67,15.94 v77.67,11.9 IC12.11 | 77.67,24.4 IC13.11 | 77.67,24.4 77.62,24.45 77.62,26.81 78.59,27.78 78.59,41.69 77.62,42.66 IC15.9
  Bottom 0.203: v17.5,11.9 v41.02,11.9 v77.67,11.9
A3  (via drill 0.3, 0.35)  (3 unrouted)
  Top 0.203: IC10.10 39.75,24.24 40.3,23.69 40.3,15.99 39.75,15.44 v39.75,11.29 IC8.10 | IC11.10 16.23,24.14 16.79,23.59 16.79,16.09 16.23,15.54 v16.23,11.29 IC9.10 | 75.13,24.4 75.13,22.13 76.05,21.22 76.05,16.85 75.13,15.94 v75.13,11.29 IC12.10 | 75.13,24.4 IC13.10 | 75.13,24.4 75.08,24.45 75.08,26.81 76.05,27.78 76.05,41.69 75.08,42.66 IC15.8
  Bottom 0.203: v16.23,11.29 v39.75,11.29 v75.13,11.29
A4  (via drill 0.3, 0.35)  (3 unrouted)
  Top 0.203: IC10.9 38.48,24.24 39.03,23.69 39.03,15.99 38.48,15.44 v38.48,10.68 IC8.9 | IC11.9 14.96,24.14 15.52,23.59 15.52,16.09 14.96,15.54 v14.96,10.68 IC9.9 | IC12.9 v72.59,10.68 72.59,15.94 73.51,16.85 73.51,21.22 72.59,22.13 IC13.9 72.54,24.55 72.54,26.81 73.51,27.78 73.51,41.69 72.54,42.66 IC15.7
  Bottom 0.203: v14.96,10.68 v38.48,10.68 v72.59,10.68
A5  (via drill 0.3)  (2 unrouted)
  Top 0.203: IC10.8 37.21,24.24 37.77,23.69 37.77,15.99 37.21,15.44 IC8.8 37.19,6.37 v37.19,0.93 | IC11.8 13.69,24.14 14.24,23.59 14.24,16.09 13.69,15.54 IC9.8 13.69,0.95 v13.72,0.93 | 70.05,24.4 70.05,22.13 70.97,21.22 70.97,16.85 70.05,15.94 IC12.8 | 70.05,24.4 IC13.8 | 70.05,24.4 70,24.45 70,26.81 70.97,27.78 70.97,41.69 70,42.66 IC15.6
  Bottom 0.203: v13.72,0.93 v37.19,0.93 69.19,0.93 70.05,1.79 IC12.8
A6  (via drill 0.3)  (2 unrouted)
  Top 0.203: IC10.7 35.94,24.24 36.49,23.69 36.49,15.99 35.94,15.44 IC8.7 35.97,6.37 v35.97,1.54 | IC11.7 12.42,24.14 12.97,23.59 12.97,16.09 12.42,15.54 IC9.7 12.42,1.61 v12.5,1.54 | 67.51,24.4 67.51,22.13 68.43,21.22 68.43,16.85 67.51,15.94 IC12.7 | 67.51,24.4 IC13.7 | 67.51,24.4 67.46,24.45 67.46,26.81 68.43,27.78 68.43,41.69 67.46,42.66 IC15.5
  Bottom 0.203: v12.5,1.54 v35.97,1.54 66.45,1.54 67.51,2.6 IC12.7
A7  (via drill 0.3, 0.35)  (2 unrouted)
  Top 0.203: IC10.6 34.67,24.24 35.23,23.69 35.23,15.99 34.67,15.44 IC8.6 34.75,6.32 v34.75,2.15 | IC11.6 11.15,24.14 11.71,23.59 11.71,16.09 11.15,15.54 IC9.6 11.15,2.27 v11.28,2.15 | IC12.6 v64.97,6.41 64.97,15.94 65.89,16.85 65.89,21.22 64.97,22.13 IC13.6 64.92,24.55 64.92,26.81 65.89,27.78 65.89,41.69 64.92,42.66 IC15.4
  Bottom 0.203: v11.28,2.15 v34.75,2.15 45.41,2.15 49.68,6.41 v64.97,6.41
A8  (via drill 0.3, 0.35)  (2 unrouted)
  Top 0.203: IC10.5 33.4,24.24 33.95,23.69 33.95,15.99 33.4,15.44 IC8.5 33.4,2.93 v33.22,2.76 | IC11.5 9.88,24.14 10.44,23.59 10.44,16.09 9.88,15.54 IC9.5 9.88,2.93 v10.06,2.76 | 62.43,24.09 62.43,22.13 63.35,21.22 63.35,16.85 62.43,15.94 v62.43,7.02 IC12.5 | 62.43,24.09 IC13.5 | 62.43,24.09 62.38,24.14 62.38,26.81 63.35,27.78 63.35,41.69 62.38,42.66 IC15.3
  Bottom 0.203: v10.06,2.76 v33.22,2.76 45.41,2.76 49.68,7.02 v62.43,7.02
A9  (via drill 0.3)  (3 unrouted)
  Top 0.203: IC8.27 34.67,23.74 34.12,24.29 34.12,27.92 34.67,28.48 34.67,37.5 | 34.67,37.5 IC10.27 | IC9.27 11.15,23.64 10.6,24.19 10.6,27.82 11.15,28.38 IC11.27 11.15,41.59 v10.97,41.77 | IC12.27 64.97,21.63 64.06,22.54 64.06,26.45 64.97,27.37 IC13.27 64.97,42.1 64.01,43.07 64.01,46.97 64.97,47.94 64.97,60.21 IC15.25 | v34.44,41.77 34.67,41.54 34.67,37.5
  Bottom 0.203: v10.97,41.77 v34.44,41.77
A10  (via drill 0.3)  (3 unrouted)
  Top 0.203: IC8.26 35.94,23.74 35.39,24.29 35.39,27.92 35.94,28.48 35.94,37.2 | 35.94,37.2 IC10.26 | IC9.26 12.42,23.64 11.87,24.19 11.87,27.82 12.42,28.38 IC11.26 12.5,37.49 v12.5,42.38 | IC12.26 67.51,21.63 66.6,22.54 66.6,26.45 67.51,27.37 IC13.26 67.51,42.1 66.55,43.07 66.55,46.97 67.51,47.94 67.51,60.21 IC15.24 | v35.97,42.38 35.94,42.35 35.94,37.2
  Bottom 0.203: v12.5,42.38 v35.97,42.38
A11  (via drill 0.3, 0.35)  (2 unrouted)
  Top 0.203: IC8.23 39.75,23.74 39.2,24.29 39.2,27.92 39.75,28.48 v39.75,31.41 IC10.23 | IC9.23 16.23,23.64 15.68,24.19 15.68,27.82 16.23,28.38 v16.23,31.41 16.23,31.71 IC11.23 | IC12.23 75.13,21.63 74.22,22.54 74.22,26.45 75.13,27.37 v75.13,31.41 IC13.23 75.13,42.1 74.17,43.07 74.17,46.97 75.13,47.94 75.13,60.21 IC15.21
  Bottom 0.203: v16.23,31.41 v39.75,31.41 v75.13,31.41
A12  (via drill 0.3)  (3 unrouted)
  Top 0.203: IC8.25 37.21,23.74 36.66,24.29 36.66,27.92 37.21,28.48 37.21,37.5 | 37.21,37.5 IC10.25 | IC9.25 13.69,23.64 13.14,24.19 13.14,27.82 13.69,28.38 IC11.25 13.69,42.96 v13.72,42.99 | IC12.25 70.05,21.63 69.14,22.54 69.14,26.45 70.05,27.37 IC13.25 70.05,42.1 69.09,43.07 69.09,46.97 70.05,47.94 70.05,60.21 IC15.23 | v37.19,42.99 37.21,42.96 37.21,37.5
  Bottom 0.203: v13.72,42.99 v37.19,42.99
A13  (via drill 0.3, 0.35)  (2 unrouted)
  Top 0.203: IC10.4 32.13,24.24 32.69,23.69 32.69,15.99 32.13,15.44 IC8.4 32.13,3.49 v32,3.37 | IC11.4 8.61,24.14 9.16,23.59 9.16,16.09 8.61,15.54 IC9.4 8.53,6.42 v8.53,3.37 | IC12.4 v59.89,7.63 59.89,15.94 60.81,16.85 60.81,21.22 59.89,22.13 IC13.4 59.84,24.55 59.84,26.81 60.81,27.78 60.81,41.69 59.84,42.66 IC15.2
  Bottom 0.203: v8.53,3.37 v32,3.37 45.41,3.37 49.68,7.63 v59.89,7.63
A14  (via drill 0.3, 0.35)  (2 unrouted)
  Top 0.203: IC8.28 33.4,23.74 | 33.4,36.89 33.4,28.48 32.85,27.92 32.85,24.29 33.4,23.74 | 33.4,36.89 IC10.28 | IC9.28 9.88,23.64 9.33,24.19 9.33,27.82 9.88,28.38 IC11.28 9.88,41.01 v9.75,41.14 | IC12.28 62.43,21.63 61.52,22.54 61.52,26.45 62.43,27.37 IC13.28 62.43,42.1 61.47,43.07 61.47,46.97 62.43,47.94 62.43,60.21 IC15.26 | v33.22,41.16 33.22,37.07 33.4,36.89 | 33.4,23.74 33.37,23.71 v33.37,21.06
  Bottom 0.203: v9.75,41.14 33.2,41.14 v33.22,41.16 | v33.37,21.06 62.15,21.06 62.46,20.75 62.43,20.73 IC12.28
A15  (via drill 0.3, 0.35)  (2 unrouted)
  Top 0.203: IC10.3 30.86,24.24 31.41,23.69 | 31.41,23.69 31.41,15.99 30.86,15.44 IC8.3 30.86,4.05 v30.79,3.97 | IC11.3 7.34,24.14 7.89,23.59 7.89,16.09 7.34,15.54 IC9.3 7.34,4 v7.32,3.97 | IC12.29 59.89,21.63 v59.23,22.29 58.98,22.54 58.98,26.45 59.89,27.37 IC13.29 59.89,42.1 59.49,42.51 59.49,42.84 IC15.1 | 31.41,23.69 31.44,23.66 v31.44,22.27
  Bottom 0.203: v7.32,3.97 v30.79,3.97 | v31.44,22.27 59.21,22.27 v59.23,22.29
A16  (via drill 0.3, 0.35)  (3 unrouted)
  Top 0.203: IC8.31 29.59,22.85 | 29.59,22.85 29.59,23.74 29.04,24.29 29.04,27.92 29.59,28.48 IC10.31 29.59,39.31 v29.57,39.33 | IC9.31 6.07,23.64 5.52,24.19 5.52,27.82 6.07,28.38 IC11.31 6.07,39.31 v6.1,39.33 | IC13.3 57.35,22.13 58.27,21.22 58.27,16.85 57.35,15.94 IC12.3 | 29.59,22.85 v29.56,22.85
  Bottom 0.203: v6.1,39.33 v29.57,39.33 | v29.56,22.85 56.94,22.85 57.35,23.26 IC13.3
A17  (via drill 0.3, 0.35)  (3 unrouted)
  Top 0.203: IC10.2 29.59,24.24 30.14,23.69 30.14,15.99 29.59,15.44 IC8.2 29.57,6.37 v29.57,4.58 | IC11.2 6.07,24.14 6.62,23.59 6.62,16.09 6.07,15.54 IC9.2 6.1,6.47 v6.1,4.58 | IC13.2 54.81,22.77 55.73,21.85 55.73,16.85 54.81,15.94 v54.81,8.24 IC12.2
  Bottom 0.203: v6.1,4.58 v29.57,4.58 46.02,4.58 49.68,8.24 v54.81,8.24
A18  (4 unrouted)
  Top 0.203: IC12.30 57.35,21.63 56.44,22.54 56.44,26.45 57.35,27.37 IC13.30
A19  (5 unrouted)
  Top 0.203: IC13.1 52.43,24.35 52.43,22.13 53.65,20.91 53.65,5.55 IC12.1
A20  (2 unrouted)
A21  (2 unrouted)
A22  (2 unrouted)
A23  (2 unrouted)
CLK  (2 unrouted)
D0  (via drill 0.35)  (3 unrouted)
  Top 0.203: IC11.13 20.12,26.69 v20.12,28.66 | v43.59,28.66 43.59,26.74 IC10.13 | IC15.11 82.75,44.97 82.75,42.71 81.84,41.79 81.84,37.78 82.75,36.87 v82.75,28.66 IC13.13
  Bottom 0.203: v20.12,28.66 v43.59,28.66 v82.75,28.66
D1  (via drill 0.35)  (3 unrouted)
  Top 0.203: IC11.14 21.31,29.25 v21.34,29.27 | v44.81,29.27 44.81,26.74 IC10.14 | IC15.12 85.29,44.97 85.29,42.71 84.38,41.79 84.38,37.78 85.29,36.87 v85.29,29.27 IC13.14
  Bottom 0.203: v21.34,29.27 v44.81,29.27 v85.29,29.27
D2  (via drill 0.35)  (3 unrouted)
  Top 0.203: IC11.15 22.58,29.86 v22.55,29.88 | v46.02,29.88 46.02,26.79 IC10.15 | IC15.13 87.78,42.66 86.92,41.79 86.92,37.78 87.78,36.92 v87.78,29.88 87.78,24.55 IC13.15
  Bottom 0.203: v22.55,29.88 v46.02,29.88 v87.78,29.88
D3  (via drill 0.35)  (3 unrouted)
  Top 0.203: IC11.17 23.85,33.31 v23.77,33.24 | v47.24,33.24 47.37,33.36 IC10.17 | IC13.17 90.32,39.79 90.32,42.15 91.24,43.07 91.24,46.97 90.32,47.89 IC15.15
  Bottom 0.203: v23.77,33.24 v47.24,33.24 88.7,33.24 90.37,34.91 IC13.17
D4  (via drill 0.35)  (3 unrouted)
  Top 0.203: IC10.18 46.1,33.92 v46.02,33.85 | v22.55,33.85 22.55,37.39 IC11.18 | IC13.18 87.78,39.79 87.78,42.15 88.7,43.07 88.7,46.97 87.78,47.89 IC15.16
  Bottom 0.203: v22.55,33.85 v46.02,33.85 86.56,33.85 87.83,35.12 IC13.18
D5  (via drill 0.35)  (3 unrouted)
  Top 0.203: IC10.19 44.83,34.48 v44.81,34.45 | v21.34,34.45 21.31,34.48 IC11.19 | IC13.19 85.24,39.79 85.24,42.15 86.16,43.07 86.16,46.97 85.24,47.89 IC15.17
  Bottom 0.203: v21.34,34.45 v44.81,34.45 84.12,34.45 85.34,35.67 85.34,39.69 IC13.19
D6  (via drill 0.35)  (3 unrouted)
  Top 0.203: IC10.20 43.56,35.09 v43.59,35.06 | v20.12,35.06 20.12,37.34 IC11.20 | IC13.20 82.7,39.79 82.7,42.15 83.62,43.07 83.62,46.97 82.7,47.89 IC15.18
  Bottom 0.203: v20.12,35.06 v43.59,35.06 81.38,35.06 82.75,36.44 IC13.20
D7  (via drill 0.35)  (3 unrouted)
  Top 0.203: IC10.21 42.29,35.75 v42.37,35.67 | v18.9,35.67 18.77,35.8 IC11.21 | IC15.19 80.21,60.21 80.21,47.94 79.25,46.97 79.25,43.98 80.21,43.02 IC13.21
  Bottom 0.203: v18.9,35.67 v42.37,35.67 79.25,35.67 80.21,36.64 IC13.21
D8  (via drill 0.35)  (2 unrouted)
  Top 0.203: IC8.13 43.59,6.42 v43.59,8.85 | v20.12,8.85 20.12,6.58 IC9.13
  Bottom 0.203: v20.12,8.85 v43.59,8.85 81.38,8.85 82.75,7.48 IC12.13
D9  (via drill 0.35)  (2 unrouted)
  Top 0.203: IC8.14 44.83,9.44 v44.81,9.46 | v21.34,9.46 21.34,5.8 21.31,5.83 IC9.14
  Bottom 0.203: v21.34,9.46 v44.81,9.46 84.12,9.46 85.34,8.24 85.29,8.19 IC12.14
D10  (via drill 0.35)  (2 unrouted)
  Top 0.203: IC8.15 46.02,6.47 v46.02,10.07 | v22.55,10.07 22.55,6.53 IC9.15
  Bottom 0.203: v22.55,10.07 v46.02,10.07 86.56,10.07 87.83,8.8 IC12.15
D11  (via drill 0.35)  (2 unrouted)
  Top 0.203: IC8.17 47.37,13.25 v47.24,13.12 | v23.77,13.12 23.77,17.22 IC9.17
  Bottom 0.203: v23.77,13.12 v47.24,13.12 89,13.12 90.37,14.49 IC12.17
D12  (via drill 0.35)  (2 unrouted)
  Top 0.203: IC8.18 46.1,13.8 v46.02,13.73 | v22.55,13.73 22.55,17.27 IC9.18
  Bottom 0.203: v22.55,13.73 v46.02,13.73 86.26,13.73 87.83,15.3 IC12.18
D13  (via drill 0.35)  (2 unrouted)
  Top 0.203: IC8.19 44.83,17.08 | 44.83,17.08 44.83,16.19 | v21.34,14.34 21.34,17.27 IC9.19 | v44.81,14.34 44.81,17.06 44.83,17.08
  Bottom 0.203: v21.34,14.34 v44.81,14.34 83.82,14.34 85.29,15.81 IC12.19
D14  (via drill 0.35)  (2 unrouted)
  Top 0.203: v20.12,14.95 20.12,17.22 IC9.20 | v43.59,14.95 43.59,17.17 IC8.20
  Bottom 0.203: v20.12,14.95 v43.59,14.95 81.38,14.95 82.75,16.32 IC12.20
D15  (via drill 0.35)  (2 unrouted)
  Top 0.203: IC8.21 42.37,17.12 v42.37,15.56 | v18.9,15.56 18.77,15.68 IC9.21
  Bottom 0.203: v18.9,15.56 v42.37,15.56 78.94,15.56 80.21,16.83 IC12.21
DTACK  (1 unrouted)
FC0  (2 unrouted)
FC1  (2 unrouted)
FC2  (2 unrouted)
GND  (via drill 0.35)  (18 unrouted)
  other vias: 27.21,37.73 5.78,42.43 27.83,43.93 3.66,53.52
  pour Top: 0,0.01 0,100.01 150,100.01 150,0.01
  pour Bottom: 0,0.01 0,100.01 150,100.01 150,0.01
GPIO_OUT0  (1 unrouted)
GPIO_OUT1  (1 unrouted)
GPIO_OUT2  (1 unrouted)
GPIO_OUT3  (1 unrouted)
GPIO_OUT4  (1 unrouted)
GPIO_OUT5  (1 unrouted)
GPIO_OUT6  (1 unrouted)
N$1
  Top 0.203: IC16.2 C35.+
N$2
  Top 0.203: IC16.6 C36.-
N$3
  Top 0.203: IC16.1 22.45,72.61 C33.+
N$4
  Top 0.203: IC16.4 C34.+
N$5
  Top 0.203: IC16.3 29.87,75.35 29.87,76.82 29.57,77.13 23.77,77.13 21.03,74.38 21.03,69.81 21.67,69.18 C33.-
N$6
  Top 0.203: IC16.5 35.15,71.72 C34.-
N$7
  Top 0.203: LED9.A R19.2
N$8
  Top 0.203: LED8.A R18.2
N$9
  Top 0.203: R11.2 115.55,12.2 113.09,14.66 S2.2 S2.1
N$10
  Top 0.203: LED7.A R17.2
N$11
  Top 0.203: LED6.A R16.2
N$12
  Top 0.203: LED3.A R2.2
N$13
  Top 0.203: LED5.A R15.2
N$14
  Top 0.203: LED4.A R14.2
N$15
  Top 0.203: LED2.A R1.2
N$17
  Top 0.203: LED10.A R20.2
N$18
  Top 0.203: R10.2 113.41,7.02 S1.2 S1.1
N$19
  Top 0.203: LED1.A R3.2
NMI_SW
  Top 0.203: C12.1 R12.1 R10.1 121.75,6.92 IC7.13
R!W!  (2 unrouted)
R/!W!  (via drill 0.3, 0.35)  (1 unrouted)
  Top 0.203: IC8.29 32.13,21.71 | 32.13,21.71 32.13,23.74 31.58,24.29 31.58,27.92 32.13,28.48 32.13,37.5 | 32.13,37.5 IC10.29 | IC9.29 8.61,23.64 8.06,24.19 8.06,27.82 8.61,28.38 IC11.29 8.61,40.47 v8.53,40.55 | IC12.31 54.81,21.63 | 54.81,21.63 53.9,22.54 53.9,26.45 54.81,27.37 IC13.31 54.81,45.38 59.84,50.41 IC15.27 | v32,40.55 32,37.63 32.13,37.5 | 32.13,21.71 v32.1,21.69 | v54.81,21.65 54.81,21.63
  Bottom 0.203: v8.53,40.55 v32,40.55 | v32.1,21.69 54.06,21.69 54.77,21.69 v54.81,21.65
REGION15  (2 unrouted)
RESET_SW
  Top 0.203: R11.1 121.85,12 123.44,12 | 123.44,12 IC7.9 | C13.1 R11.1 | R11.1 R13.1 | IC7.11 123.75,9.46 123.44,9.77 123.44,12
RS232_0_RX
  Bottom 0.203: X2.2 29.26,81.09 30.07,81.9 IC16.14
RS232_0_TX
  Top 0.203: X2.3 23.16,83.83 24.38,85.05 31.39,85.05 32.61,83.83 IC16.13
RS232_1_RX
  Bottom 0.203: X3.2 31.34,85.75 31.34,78.96 33.22,77.13 39.62,77.13 40.23,76.52 IC16.7
RS232_1_TX
  Bottom 0.203: X3.3 33.88,86.05 33.88,78.35 34.7,77.48 39.85,77.48 42.19,75.15 IC16.8
UART0_RX
  Top 0.203: IC16.12 35.15,84.54 35.97,85.36 56.69,85.36 57.3,85.97 60.96,85.97 61.57,85.36 61.57,82.61 61.21,82.26 IC14.35
UART0_TX
  Top 0.203: IC14.33 38.46,84.8 37.69,84.04 IC16.11
UART1_RX  (1 unrouted)
UART1_TX  (1 unrouted)

## Text on the board
tNames: +5V In | Low ROM | !RESET | High ROM | !NMI